# Allegro board imx415_to_22pin.brd
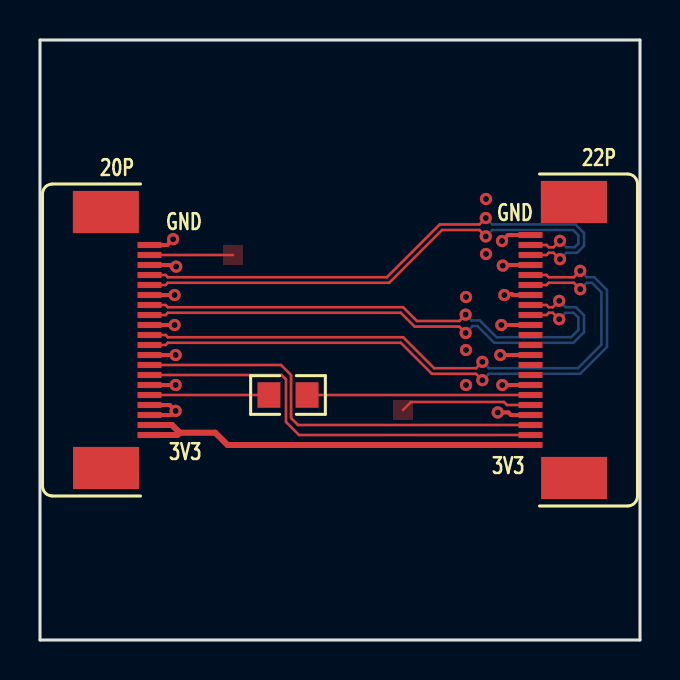
[diagram p0: board, top side]
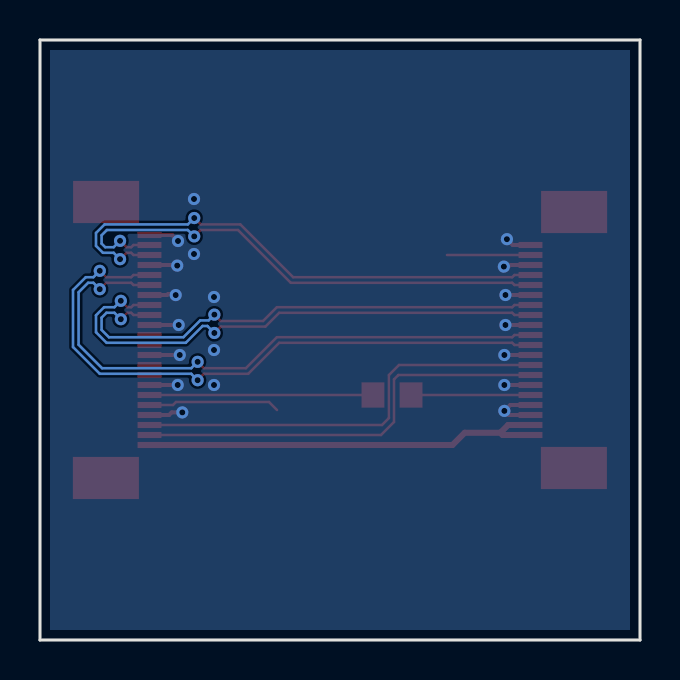
[diagram p1: board, bottom side, seen from below]

Outline 30 x 30 mm; copper layers: TOP, BOTTOM. Coordinates in mm from the lower left corner of the outline.
Outline path: 0,30 0,0 30,0 30,30 0,30

## Design rules (mm)
constraint set DEFAULT: min track width 0.127, pair gap 0.152
net group CLK: nets CLK_N CLK_P
net group D0: nets D0_N D0_P
net group D1: nets D1_N D1_P
net group D2: nets D2_N D2_P
net group D3: nets D3_N D3_P

## Placement (name value [footprint] x y rotation side)
NOREF  -  []  24.52 19.25 90 top
NOREF#2  -  []  0 0 0 top
NOREF#3  -  []  24.37 9.15 90 top
NOREF#4  -  []  21.48 4.9 0 top
NOREF#5  -  []  2.24 19.75 90 top
NOREF#6  -  []  2.24 19.75 0 top
NOREF#7  -  []  32.87 10.35 0 top
NOREF#8  -  []  21.82 5.92 90 top
NOREF#9  -  []  21.82 5.92 90 top
NOREF#10  -  []  11.38 11.62 0 top
NOREF#11  -  []  0 0 0 top
NOREF#12  -  []  17.52 14.4 90 top
NOREF#13  -  []  13.42 11.62 90 top
NOREF#14  -  []  5.47 11.25 90 top
NOREF#15  -  []  21.82 5.92 0 top
NOREF#16  -  []  4.36 10.25 0 top
NOREF#17  -  []  38.58 4.4 90 top
NOREF#18  -  []  10.53 11.28 90 top
NOREF#19  -  []  12.78 11.62 0 top
NOREF#20  -  []  5.32 12.85 0 top
NOREF#21  -  []  10.88 11.62 90 top
NOREF#22  -  []  5.32 19.15 90 top
NOREF#23  -  []  24.52 20.25 0 top
NOREF#24  -  []  10.53 11.28 0 top
NOREF#25  -  []  2.42 14.9 0 top
NOREF#26  -  []  2.24 19.75 90 top
P1  AFC07-S22FCA-00  [CON_JS_AFC07-S22FCA-00]  24.52 9.75 90 top
P2  AFC07-S20ECC-00  [CON_614X193_22P_20P]  5.47 19.75 270 top
R1  RC0805FR-071RL  [R0805]  12.4 12.25 0 top

## Library data of the parts
P1 = AFC07-S22FCA-00
P2 = AFC07-S20ECC-00
R1 = RC0805FR-071RL

## Footprints (pads in the part's own frame, mm; a bottom-side part is the same pattern mirrored in y, then rotated)
CON_614X193_22P_20P
  rect 2.108x3.302 smd: (-1.65,-2.181) (11.15,-2.17)
  rect 0.305x1.194 smd: 1(0,0) 2(0.5,0) 3(1,0) 4(1.5,0) 5(2,0) 6(2.5,0) 7(3,0) 8(3.5,0) 9(4,0) 10(4.5,0) 11(5,0) 12(5.5,0) 13(6,0) 14(6.5,0) 15(7,0) 16(7.5,0) 17(8,0) 18(8.5,0) 19(9,0) 20(9.5,0)
CON_JS_AFC07-S22FCA-00
  rect 2.108x3.302 smd: (-1.65,-2.181) (12.15,-2.17)
  rect 0.305x1.194 smd: 1(0,0) 2(0.5,0) 3(1,0) 4(1.5,0) 5(2,0) 6(2.5,0) 7(3,0) 8(3.5,0) 9(4,0) 10(4.5,0) 11(5,0) 12(5.5,0) 13(6,0) 14(6.5,0) 15(7,0) 16(7.5,0) 17(8,0) 18(8.5,0) 19(9,0) 20(9.5,0) 21(10,0) 22(10.5,0)
R0805
  rect 1.143x1.27 smd: 1(-0.953,0) 2(0.953,0)

## Nets
3V3: P1.1 P2.19 P2.20
GND: P1.4 P1.7 P1.10 P1.13 P1.16 P1.19 P1.22 P2.1 P2.3 P2.6 P2.9 P2.12 P2.15 P2.17 P2.18
CLK_N: P1.15 P2.8
CLK_P: P1.14 P2.7
D0_N: P1.21 P2.5
D0_P: P1.20 P2.4
D1_N: P1.18 P2.11
D1_P: P1.17 P2.10
D2_N: P1.12
D2_P: P1.11
D3_N: P1.9
D3_P: P1.8
IO0: P1.5
IO1: P1.6 R1.2
MCLK: P2.2
RST: P2.16 R1.1
SCL: P1.3 P2.13
SDA: P1.2 P2.14

## Via types
v1: diameter 0.61, hole 0.305, TOP to BOTTOM, 31 vias

## Routing (per net, layer and track width the routed paths; a pad name or vN(x,y) marks a point on that pad's centre or on a via; arc(x,y) is an arc through that point)
3V3: length 21
  TOP w0.3: 6.99,10.36 8.76,10.36 9.38,9.75 P1.1 ; 6.99,10.36 6.6,10.75 P2.19 ; 6.99,10.36 6.87,10.25 P2.20
GND: length 21
  TOP w0.2: P2.17 6.49,11.75 v1(6.78,11.46) 6.58,11.25 P2.18 ; P1.13 v1(23.07,15.75) ; P2.3 6.5,18.75 6.58,18.67 v1(6.81,18.67) ; v1(23.11,12.75) 23.65,12.75 P1.7 ; P2.15 v1(6.78,12.75) ; P1.16 23.64,17.25 23.59,17.3 23.27,17.3 v1(23.22,17.25) ; P2.6 v1(6.73,17.25) ; v1(22.89,11.38) 23.42,11.38 23.55,11.25 P1.4 ; P1.10 v1(23.01,14.25) ; v1(6.65,20.04) 6.36,19.75 P2.1 ; v1(23.14,18.72) 23.17,18.75 P1.19 ; P2.12 v1(6.78,14.25) ; v1(23.1,19.95) 23.4,20.25 P1.22 ; P2.9 v1(6.73,15.75)
  vias: v1(21.3,17.15) v1(21.3,14.5) v1(21.3,12.75) v1(22.3,22.05) v1(22.3,19.3)
CLK_N: length 26.9
  TOP w0.127: P2.8 6.28,16.25 6.39,16.36 18.04,16.36 18.73,15.67 20.96,15.67 v1(21.28,15.35) ; P1.15 25.33,16.75 25.44,16.64 25.64,16.64 v1(25.96,16.96)
  BOTTOM w0.127: v1(25.96,16.96) 26.28,16.64 26.79,16.64 27.2,16.23 27.2,15.39 26.67,14.86 22.71,14.86 21.87,15.7 21.63,15.7 v1(21.28,15.35)
CLK_P: length 25.9
  TOP w0.127: P1.14 25.33,16.25 25.44,16.36 25.64,16.36 v1(25.96,16.04) ; P2.7 6.28,16.75 6.39,16.64 18.16,16.64 18.85,15.95 20.96,15.95 v1(21.28,16.27)
  BOTTOM w0.127: v1(21.28,16.27) 21.57,15.98 21.99,15.98 22.83,15.14 26.55,15.14 26.92,15.5 26.92,16.12 26.68,16.36 26.28,16.36 v1(25.96,16.04)
D0_N: length 26.2
  TOP w0.127: v1(22.29,20.18) 21.97,20.5 20.1,20.5 17.46,17.86 6.39,17.86 6.28,17.75 P2.5 ; v1(26,19.96) 25.68,19.64 25.44,19.64 25.33,19.75 P1.21
  BOTTOM w0.127: v1(26,19.96) 26.32,19.64 26.74,19.64 26.92,19.82 26.92,20.23 26.65,20.5 22.61,20.5 v1(22.29,20.18)
D0_P: length 27.1
  TOP w0.127: v1(26,19.04) 25.68,19.36 25.44,19.36 25.33,19.25 P1.20 ; P2.4 6.28,18.25 6.39,18.14 17.34,18.14 19.98,20.78 21.97,20.78 v1(22.29,21.1)
  BOTTOM w0.127: v1(26,19.04) 26.32,19.36 26.85,19.36 27.2,19.71 27.2,20.35 26.77,20.78 22.61,20.78 v1(22.29,21.1)
D1_N: length 31.6
  TOP w0.127: v1(22.12,12.99) 21.8,13.31 19.59,13.31 18.04,14.86 6.39,14.86 6.28,14.75 P2.11 ; v1(27.01,18.46) 26.69,18.14 25.44,18.14 25.33,18.25 P1.18
  BOTTOM w0.127: v1(27.01,18.46) 27.33,18.14 27.71,18.14 28.35,17.5 28.35,14.65 27.01,13.31 22.44,13.31 v1(22.12,12.99)
D1_P: length 30.7
  TOP w0.127: v1(22.12,13.91) 21.8,13.59 19.71,13.59 18.16,15.14 6.39,15.14 6.28,15.25 P2.10 ; P1.17 25.33,17.75 25.44,17.86 26.69,17.86 v1(27.01,17.54)
  BOTTOM w0.127: v1(22.12,13.91) 22.44,13.59 26.89,13.59 28.07,14.77 28.07,17.38 27.59,17.86 27.33,17.86 v1(27.01,17.54)
IO0: length 6.6
  TOP w0.127: P1.5 23.35,11.75 23.2,11.9 18.55,11.9 18.15,11.5
IO1: length 11.2
  TOP w0.127: R1.2 P1.6
MCLK: length 4.2
  TOP w0.127: P2.2 9.65,19.25
RST: length 6
  TOP w0.127: R1.1 P2.16
SCL: length 21.6
  TOP w0.127: P1.3 12.9,10.75 12.55,11.1 12.55,13.25 12.05,13.75 P2.13
SDA: length 21.5
  TOP w0.127: P2.14 12.08,13.25 12.3,13.03 12.3,10.9 12.95,10.25 P1.2

## Copper pours and planes (outline as drawn; the poured copper is in the pictures)
GND on BOTTOM: 0.5,29.5 29.5,29.5 29.5,0.5 0.5,0.5
IO0 on TOP: 18.65,12 18.65,11 17.65,11 17.65,12
MCLK on TOP: 10.15,19.75 10.15,18.75 9.15,18.75 9.15,19.75

## Text on the board
Ref Des/Silkscreen Bottom: REV. | SIZE | SCALE | DROWN BY : | CHECKED BY : | APPROVAL BY : | SHEET 1 OF 1 | DROWN NO : | NING.JIANLI | 2018-01-02 | V100R001 | A | B | C | A3 | 1:1 | PRJ NAME | 4 | 3 | 2 | 1
Ref Des/Silkscreen Top: This is  1 Text | 20P | GND | 3V3 | 22P | This is  2 Text | REV | DATE | DESIGNER | DROWN BY : | CHECKED BY : | APPROVAL BY : | REVISIONS | DESCRIPTION | SIZE | SCALE | REV. | This is  3 Text | Text table | This is  4 Text | NING.JIANLI | 2018-01-02 | DROWN NO : | SHEET 1 OF 1 | This is  5 Text | This is  6 Text | This is  7 Text | This is  8 Text | V100R001 | This is  9 Text | A | B | C | 1 | 2 | 3 | 4 | PRJ NAME | 1:1 | A3 | This is 10 Text | This is 11 Text | This is 12 Text | This is 13 Text | This is 14 Text | This is 15 Text | This is 16 Text
DIMENSION: DROWN BY : | CHECKED BY : | APPROVAL BY : | SIZE | SCALE | REV. | Manufacturer Information | BOARD NAME : | LAYERS : 08 | SilkScreen color: | SolderMask color: | Surface Finished: | Dielectric Material: | Tg: | Compare With IPC File: | If the stackup more than 8 layer(include 8 layer) default TG must be 170C | White | Green | HASL(Sn/Pb) | OSP | Golden Finger,Others HASL(Pb-Free) | Golden Finger,Ohters HASL(Sn/Pb) | FR-4 | Default | Yes | Yellow | Blue | HASL(Pb-Free) | ImAg | Other | Mid-Tg 150 C | No | BOARD THICKNESS : 1.60 mm+/-10% | Panel Mode : 1x1 | Black | Red | Immersion Gold | ImSn | Golden Finger,Others ENIG | Golden Finger,Others OSP | Hi-Tg 170 C | XXXXX | NING.JIANLI | 2018-01-02 | DROWN NO : | SHEET 1 OF 1 | V100R001 | A | B | C | 1 | 2 | 3 | 4 | PRJ NAME | 1:1 | A3
CHECKLIST: CheckList | TypeA : Document Check | A001 : Title Block - Prj Name(3 Layers) | A002 : Title Block - REV(3 Layers) | A003 : Title Block - DROWN BY(3 Layers) | A004 : Title Block - CHECKED BY(3 Layers) | A005 : Title Block - APPROVAL BY(3 Layers) | A006 : REVISIONS(1 Layers) | A007 : Dimension - Manufacture Information(1 Layer) | YES | NO | NR
